# Altium PCB DONGLE02.PcbDoc
Units mil, origin at the board's own origin, x right, y up, seen from the top; angles counter-clockwise.
Board outline 1501.71 x 652.99 mil, 2 copper layers (Top Layer, Bottom Layer), stack 41.756 mil thick; 14 components, 18 nets, 47 pads, 9 vias.
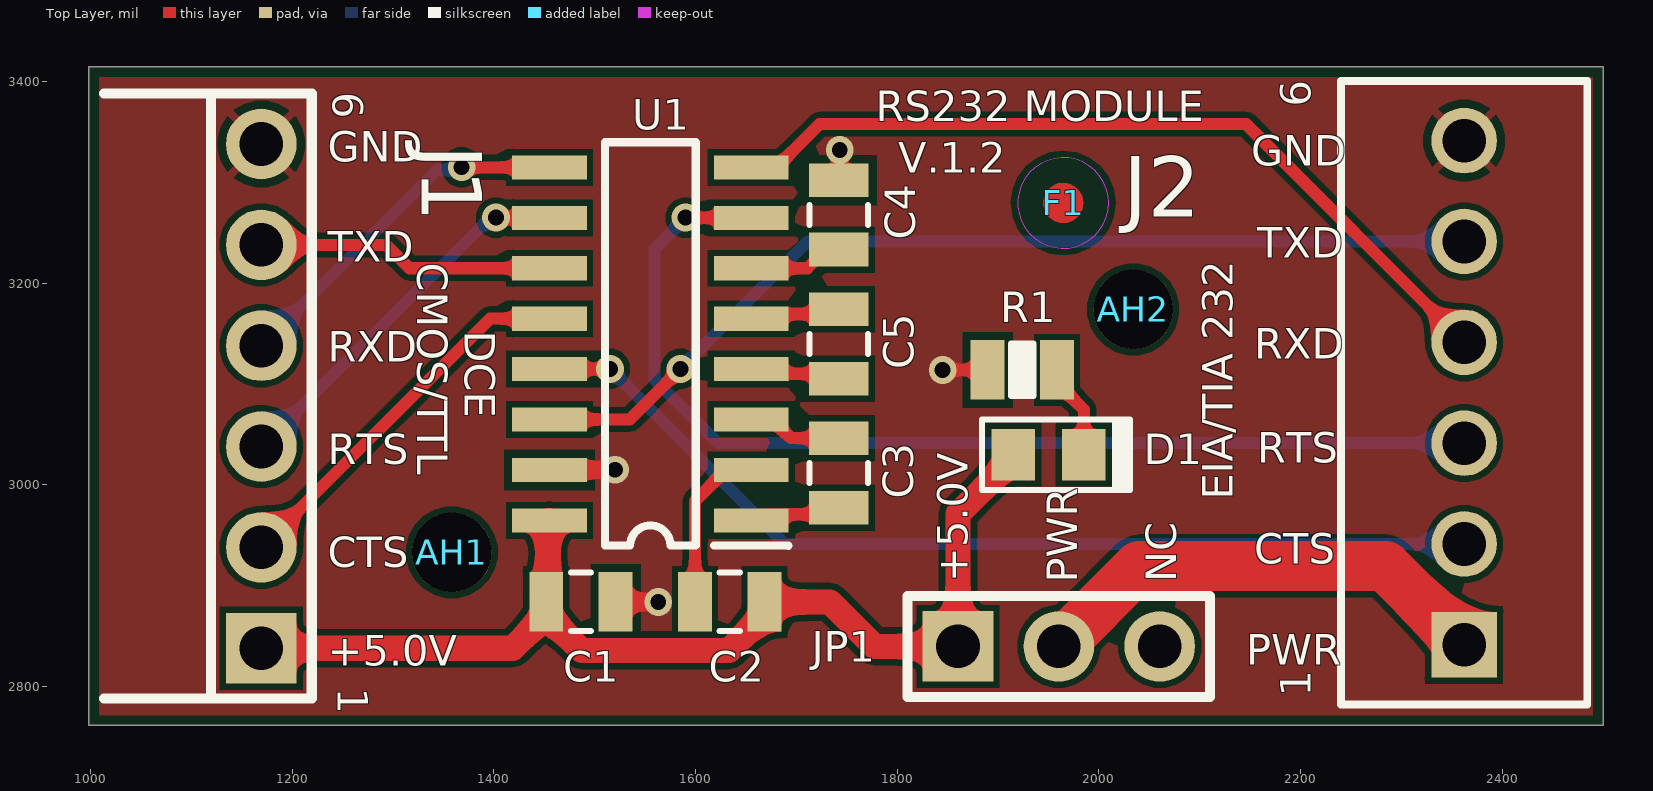
[diagram p0: Top Layer view]
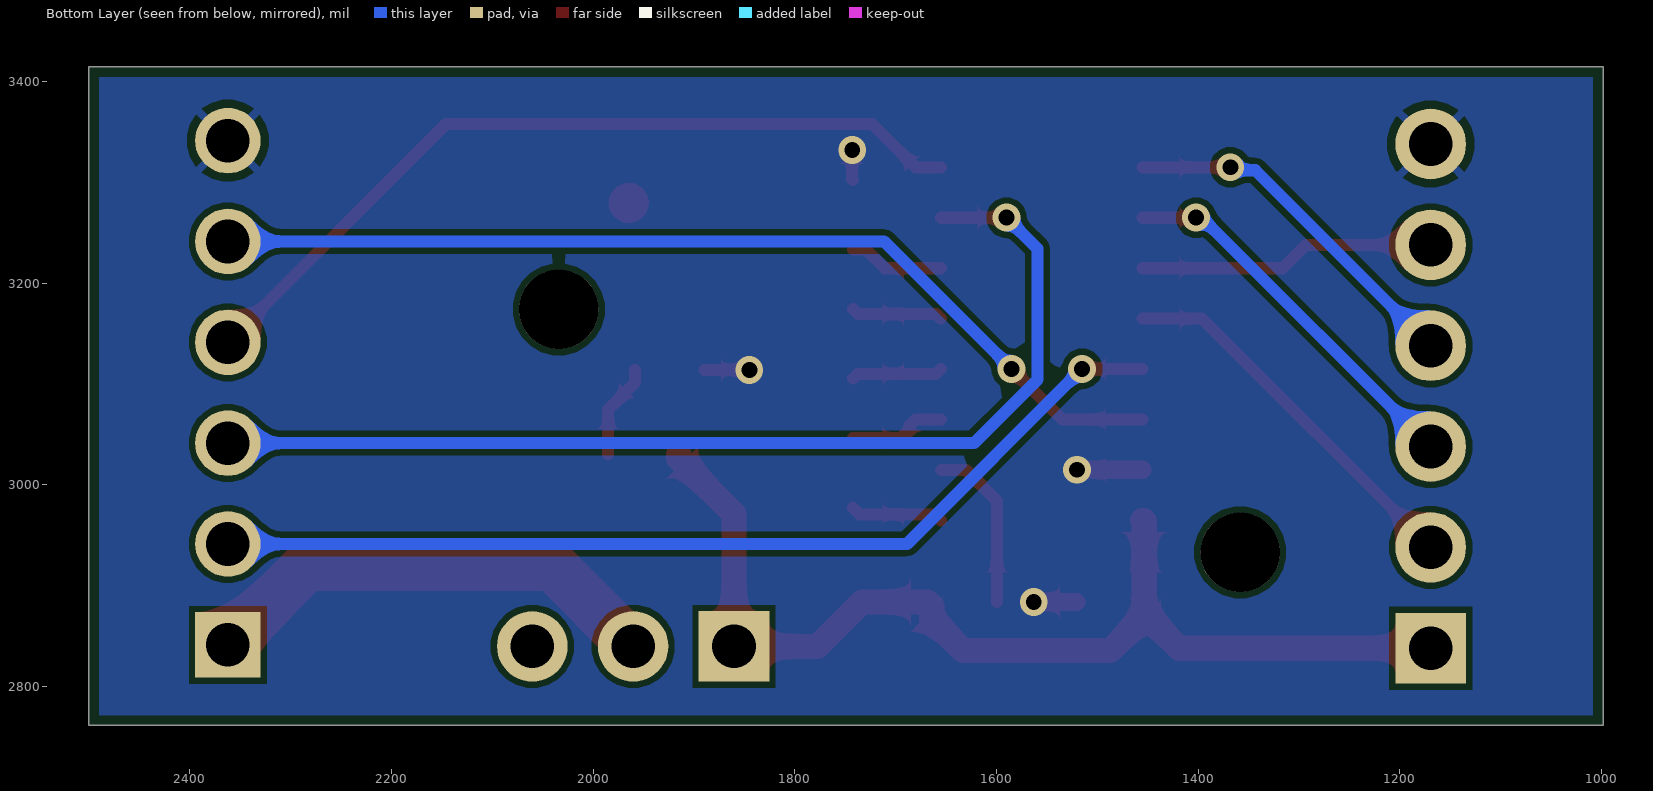
[diagram p1: Bottom Layer view, seen from below]
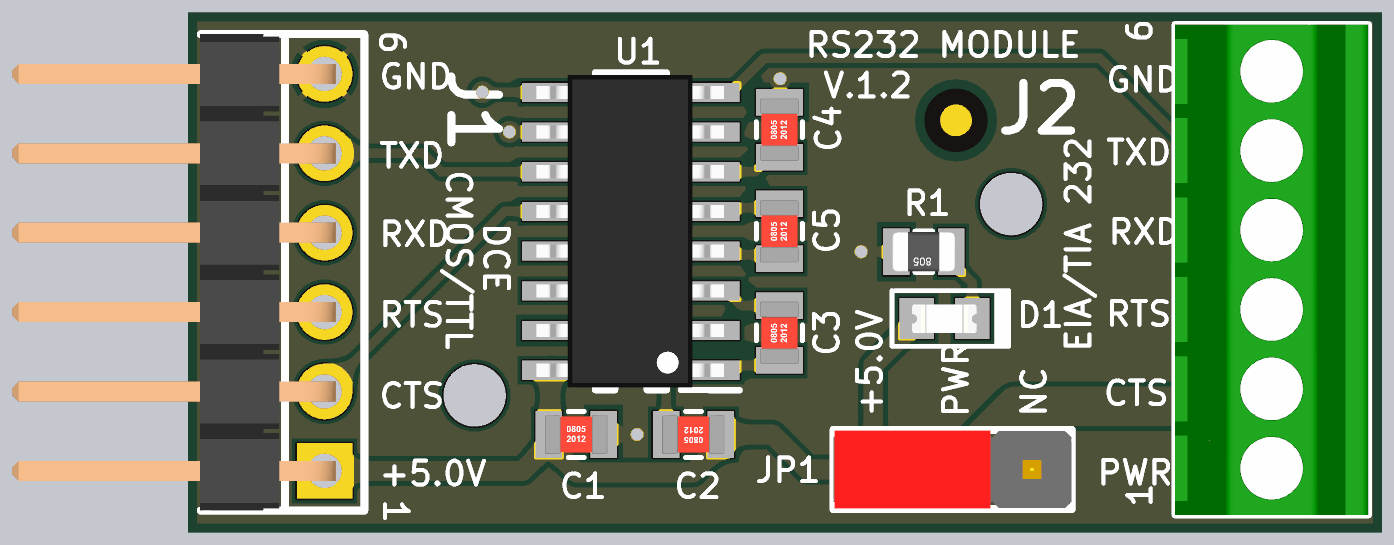
[diagram p2: 3D render of the assembled board from above, using the file's embedded part models]

## Layer stack, top to bottom
Top Solder: solder mask 1, SM-001, Dk 4
Top Layer: signal copper 1.378
Dielectric 1: core 39, Core-042, Dk 4.6
Bottom Layer: signal copper 1.378
Bottom Solder: solder mask 1, SM-001, Dk 4

## Board outline
998.29,2761.5 2500,2761.5 2500,3414.49 998.29,3414.49

## Design rules (kind name [scope] priority, off if disabled: settings)
BoardOutlineClearance [All] p1: gap=10 ignorepadtopadclearanceinfootprint=FALSE except(0: Arc-SplitContinuation Track-SplitContinuation SMDPad-SplitContinuation THPad-SplitContinuation Via-SplitContinuation Fill-SplitContinuation Poly-SplitContinuation Region-SplitContinuation Text-SplitContinuation)
Clearance [All] p1: gap=6 ignorepadtopadclearanceinfootprint=TRUE
PolygonConnect [All] p1: thpad.connectstyle=Relief thpad.reliefconductorwidth=8 thpad.reliefentries=4 thpad.polygonreliefangle="90 Angle" thpad.airgapwidth=8 thpad.conductorbypadedge=TRUE thpad.mindistance=15 thpad.enablemindistance=FALSE smdpad.connectstyle=NoConnect smdpad.reliefconductorwidth=8 smdpad.reliefentries=4 smdpad.polygonreliefangle="90 Angle" smdpad.airgapwidth=8 via.connectstyle=Direct via.reliefconductorwidth=8 via.reliefentries=4 via.polygonreliefangle="90 Angle" via.airgapwidth=8
RoutingVias [All] p1: holewidth=28 width=50 viastyle="Through Hole" minholewidth=28 minwidth=50 maxholewidth=28 maxwidth=50 useviatemplates=TRUE viatemplateguid#1={9099A8C9-6F9B-4F98-8F80-C86D27A5C1E5} viatemplatename#1=v70h40
SilkToSilkClearance [All] p1: silktosilkclearance=5
SilkToSolderMaskClearance [IsPad] p1: minsilkscreentomaskgap=3.54 clearancetoexposedcopper=TRUE
SolderMaskExpansion Via [IsVia] p1: expansion=4 istentingtop=TRUE
SolderMaskExpansion Generic [All] p2: expansion=2 istentingtop=FALSE
SupplyNets "Schematic Supply Nets_3" [InNet('+5.0V')] p1: voltage=0.000
SupplyNets "Schematic Supply Nets_2" [InNet('GND')] p2: voltage=0.000
UnRoutedNet [All] p1: checkbadconnections=TRUE
Width [All] p1: maxlimit=50 minlimit=10 preferedwidth=12
27 further rules are at their usual default settings.

## Components (designator, comment, footprint, x,y, rotation, side; value= is the part's Value field where it differs from the comment)
AH1 "Furo de Alinhamento" AH_2.0MMD 1358.27,2933.07 r0 top
AH2 "Furo de Alinhamento" AH_2.0MMD 2034,3174 r0 top
C1 "0.1uF" C0805 1486.22,2883.86 r90 top
C2 "0.33uF" C0805 1633.86,2883.86 r270 top
C3 "0.047uF" C0805 1742.13,3011.81 r180 top
C4 "0.33uF" C0805 1742.13,3267.72 r180 top
C5 "0.33uF" C0805 1742.13,3139.76 r180 top
D1 "Blue Led 0805" "LED 0805" 1950,3030 r180 top
F1 "" FIDUCIAL 1964.57,3279.53 r0 top
J1 "Header 6" BERG-M-6V-H-INV 1169.29,3337.99 r270 top value="1x6 0.1\" Right Angle Pin Header"
J2 "MPT 0,5/ 6-2,54" 1725698 2362.2,2841.34 r90 top
JP1 "Header 3 Pin" JMP-3-PTH-180 1960.24,2839.76 r0 top
R1 "180R" R0805 1924,3114 r270 top
U1 "2/2 RS232 400kbps" SOIC16N 1555.12,3139.76 r180 top

## Footprints (in the part's own frame and the unit in brackets; to place one, negate y for a bottom-side part, rotate by r counter-clockwise, add the part's x,y. Pads: shape width x height; smd on the part's side, far side on the other; paste and mask are expansions set on the pad)
1725698 [mm]
  rect 1.65x1.65 hole 1.1: 1(0,0)
  round 1.65 hole 1.1: 2(2.54,0) 3(5.08,0) 4(7.62,0) 5(10.16,0) 6(12.7,0)
  silkscreen extent -1.5,-3.1 14.2,3.1, body extent -1.5,-3.1 14.2,3.1, height 8.61
AH_2.0MMD [mm] "Alignment Hole M2"
  round 2 hole 2 unplated: 1(0,0)
BERG-M-6V-H-INV [mil] "Conector Barra Pinos 6 vias 90º passo 0.1\""
  rect 70x70 hole 43.31: 1(500,0)
  round 70 hole 43.31: 2(400,0) 3(300,0) 4(200,0) 5(100,0) 6(0,0)
  silkscreen extent -50,-156 550,50, body extent -50,-393 550,15, height 103
C0805 [mm]
  rect 1.5x0.85 smd mask+0.05: 1(0,0.875) 2(0,-0.875)
  silkscreen extent -0.74,-0.25 0.74,0.25, body extent -0.62,-1 0.63,1, height 0.9
FIDUCIAL [mil] "Alvo Optico"
  Top Layer circle w20: c0,0 r10
  Top Layer pour cut-out: -45,0 -44.62,-5.87 -43.47,-11.65 -41.57,-17.22 -38.97,-22.5 -35.7,-27.39 -31.82,-31.82 -27.39,-35.7 -22.5,-38.97 -17.22,-41.57 -11.65,-43.47 -5.87,-44.61 0,-45 5.87,-44.61 11.65,-43.47 17.22,-41.57 22.5,-38.97 27.39,-35.7 31.82,-31.82 35.7,-27.39 38.97,-22.5 41.57,-17.22 43.47,-11.65 44.62,-5.87 45,0 44.62,5.87 43.47,11.65 41.57,17.22 38.97,22.5 35.7,27.39 31.82,31.82 27.39,35.7 22.5,38.97 17.22,41.57 11.65,43.47 5.87,44.62 0,45 -5.87,44.62 -11.65,43.47 -17.22,41.57 -22.5,38.97 -27.39,35.7 -31.82,31.82 -35.7,27.39 -38.97,22.5 -41.57,17.22 -43.47,11.65 -44.62,5.87
  Top Layer keep-out circle w1: c0,0 r45
JMP-3-PTH-180 [mil] "Jumper 3 pinos PTH 180º passo 2.54mm"
  rect 70x70 hole 43.31: 1(-100,0)
  round 70 hole 43.31: 2(0,0) 3(100,0)
  silkscreen extent -150,-50 150,50, body extent -150,-49 150,49, height 323
"LED 0805" [mm]
  rect 1.1x1.3 smd mask+0.051: A(0.889,0) K(-0.889,0)
  silkscreen extent -2.06,-0.89 1.68,0.89, body extent -1.03,-0.44 1.03,0.47, height 0.85
R0805 [mm]
  rect 1.5x0.85 smd mask+0.05: 1(0,0.875) 2(0,-0.875)
  silkscreen extent -0.66,-0.28 0.66,0.28, body extent -0.62,-1 0.63,1, height 0.78
SOIC16N [mil] "16 Pin SOIC Narrow (9,90x3,90)"
  rect 74x24 smd: 1(-100,175) 2(-100,125) 3(-100,75) 4(-100,25) 5(-100,-25) 6(-100,-75) 7(-100,-125) 8(-100,-175) 9(100,-175) 10(100,-125) 11(100,-75) 12(100,-25) 13(100,25) 14(100,75) 15(100,125) 16(100,175)
  silkscreen extent -137,-200 45,200, body extent -117,-197 119,197, height 69

## Part data
AH1 AH2: library part "Aligment Hole M2", RefDes=RefDes, Supplier=Digikey
C1: library part CAP, "0.1 µF ±10% 100V Ceramic Capacitor X7R 0805 (2012 Metric)", Manufacturer="Murata Electronics", Manufacturer P/N=GCM21BR72A104KA37L, Datasheet Web=https://search.murata.co.jp/Ceramy/image/img/A01X/G101/ENG/GCM033R71A103KA03-01A.pdf, Info=MLCC, RefDes=RefDes, Supplier=Digikey, Supplier P/N (Cut Tape)=490-4789-1-ND, Supplier P/N (Tape & Reel)=490-4789-2-ND, Supplier Web=https://www.digikey.com/en/products/detail/murata-electronics/GCM21BR72A104KA37L/1641663?s=N4IgTCBcDaIOIGECyYCMAhASgdjAQVQAYAWAaTwGZsAZEAXQF8g
C2 C4 C5: library part CAP, "0.33 µF ±5% 25V Ceramic Capacitor X7R 0805 (2012 Metric)", Manufacturer=KEMET, Manufacturer P/N=C0805C334J3RECAUTO7210, Datasheet Web=https://content.kemet.com/datasheets/KEM_C1090_X7R_ESD.pdf, Info=MLCC, RefDes=RefDes, Supplier=Digikey, Supplier P/N (Cut Tape)=399-C0805C334J3RECAUTO7210CT-ND, Supplier P/N (Tape & Reel)=399-C0805C334J3RECAUTO7210TR-ND, Supplier Web=https://www.digikey.com/en/products/detail/kemet/C0805C334J3RECAUTO7210/8647991
C3: library part CAP, "0.047 µF ±5% 25V Ceramic Capacitor X7R 0805 (2012 Metric)", Manufacturer="KYOCERA AVX", Manufacturer P/N=KGM21NR71E473JT, Datasheet Web=https://datasheets.kyocera-avx.com/KGM_X7R.pdf, Info=MLCC, RefDes=RefDes, Supplier=Digikey, Supplier P/N (Cut Tape)=478-KGM21NR71E473JTCT-ND, Supplier P/N (Tape & Reel)=478-KGM21NR71E473JTTR-ND, Supplier Web=https://www.digikey.com/en/products/detail/kyocera-avx/KGM21NR71E473JT/1602247
D1: library part "LED GREEN 0805", "Blue 470nm LED Indication - Discrete 3.2V 0805 (2012 Metric)", Manufacturer="Würth Elektronik", Manufacturer P/N=150080BS75000, Datasheet Web=https://www.we-online.com/components/products/datasheet/150080BS75000.pdf, Info="Id = 0.5 Inom (10mA)", RefDes=RefDes, Supplier=Digikey, Supplier P/N (Cut Tape)=732-4982-1-ND, Supplier P/N (Tape & Reel)=732-4982-2-ND, Supplier Web=https://www.digikey.com/en/products/detail/w%C3%BCrth-elektronik/150080BS75000/4489912
F1: library part FIDUCIAL, "FIDUCIAL MARK", RefDes=rRefDes, Supplier=Digikey
J1: "Connector Header Through Hole, Right Angle 6 position 0.100\" (2.54mm)", Manufacturer="Adam Tech", Manufacturer P/N=PH1RB-06-UA, Datasheet Web=https://app.adam-tech.com/products/download/data_sheet/201281/ph1rb-xx-ua-data-sheet.pdf, Info="CONN HEADER R/A 6POS 2.54MM", RefDes=RefDes, Supplier=Digikey, Supplier P/N (Cut Tape)=2057-PH1RB-06-UA-ND, Supplier P/N (Tape & Reel)=2057-PH1RB-06-UA-ND, Supplier Web=https://www.digikey.com/en/products/detail/adam-tech/PH1RB-06-UA/9830592
J2: library part 691322110006, "6 Position Wire to Board Terminal Block Horizontal with Board 0.100\" (2.54mm) Through Hole", Manufacturer="Phoenix Contact", Manufacturer P/N=1725698, Datasheet Web=https://www.phoenixcontact.com/en-us/products/printed-circuit-board-terminal-mpt-05-6-254-1725698?type=pdf, Info="Borne 6pos 6A e=2,54", RefDes=RefDes, Supplier=Digikey, Supplier P/N (Cut Tape)=277-1277-ND, Supplier P/N (Tape & Reel)=277-1277-ND, Supplier Web=https://www.digikey.com/en/products/detail/phoenix-contact/1725698/267466
JP1: library part "Jumper 3", "3 Pin Jumper", Manufacturer="Würth Elektronik", Manufacturer P/N=61300311121, Datasheet Web=https://www.we-online.com/components/products/datasheet/61300311121.pdf, Info="0.1\" Pin header 1x3", RefDes=RefDes, Supplier=Digikey, Supplier P/N (Cut Tape)=732-5316-ND, Supplier P/N (Tape & Reel)=732-5316-ND, Supplier Web=https://www.digikey.com/en/products/detail/w%C3%BCrth-elektronik/61300311121/4846825
R1: library part RESISTOR, "180 Ohms ±1% 0.25W, 1/4W Chip Resistor 0805 (2012 Metric) Anti-Sulfur Thin Film", Manufacturer="Stackpole Electronics Inc", Manufacturer P/N=RNCP0805FTD180R, Datasheet Web=https://www.seielect.com/catalog/sei-rncp.pdf, Info="1% 100 PPM", RefDes=RefDes, Supplier=Digikey, Supplier P/N (Cut Tape)=RNCP0805FTD180RCT-ND, Supplier P/N (Tape & Reel)=RNCP0805FTD180RTR-ND, Supplier Web=https://www.digikey.com/en/products/detail/stackpole-electronics-inc/RNCP0805FTD180R/2240212
U1: library part "CI SMD ST3232CDR-SO16", "2/2 Transceiver Full RS232 16-SO", Manufacturer=STMicroelectronics, Manufacturer P/N=ST3232CDR, Datasheet Web=https://www.st.com/content/ccc/resource/technical/document/datasheet/group1/40/2c/7f/62/3a/3f/47/3c/CD00002253/files/CD00002253.pdf/jcr:content/translations/en.CD00002253.pdf, Info=ST3232CDR, RefDes=RefDes, Supplier=Digikey, Supplier P/N (Cut Tape)=497-3731-1-ND, Supplier P/N (Tape & Reel)=497-3731-2-ND, Supplier Web=https://www.digikey.com/en/products/detail/stmicroelectronics/ST3232CDR/686410?s=N4IgTCBcDaIMoBUDMYUGEAiAlEBdAvkA

## Via types
v1: diameter 27.56, hole 15.75, Top Layer to Bottom Layer, tented both sides, 9 vias

## Nets (pads, with @x,y where several pads share a name; then routed paths per layer and width w, separated by ;. In a path a pad name is that pad's centre, name@x,y a point inside that pad or via, vN(x,y) a via of type N, cw(c..) or ccw(c..) an arc to the next point about the centre after c; other vN are vias at no path point)
+5.0V: C1.1 C2.1 D1.A J1.1 JP1.1 U1.16 | length 1062.5
  Top Layer w25: J1.1 1418.7,2837.99 1451.77,2871.06 1487,2835.83 1633.07,2835.83 1664.07,2866.83 1664.07,2879.63 C2.1 ; C1.1 1453.44,2885.53 1453.44,2964.26 1453.94,2964.76 U1.16 ; C2.1@1668.31,2879.63 1672.54,2883.86 1733.09,2883.86 1777.19,2839.76 JP1.1 1860.24,2971.3 1915,3026.06 D1.A
DCE.CTS: J1.2 U1.12 | length 379.8
  Top Layer w12: J1.2 1396.06,3164.76 U1.12
DCE.RTS: J1.3 U1.10 | length 380
  Top Layer w12: v1(1402,3265) 1402.12,3264.88 1455,3264.88 U1.10
  Bottom Layer w12: J1.3 1393.32,3262.02 1399.02,3262.02 v1(1402,3265)
DCE.RXD: J1.4 U1.9 | length 359.2
  Top Layer w12: v1(1368,3315) 1368.12,3314.88 1455,3314.88 U1.9
  Bottom Layer w12: J1.4 1343.32,3312.02 1365.02,3312.02 v1(1368,3315)
DCE.TXD: J1.5 U1.11 | length 295.4
  Top Layer w12: J1.5 1292.94,3237.99 1316.17,3214.76 U1.11
GND: C1.2 C4.2 J1.6 J2.6 R1.2 U1.15 | length 182
  Top Layer w12: C4.2 1743,3303.04 v1(1743,3332) ; v1(1845,3114) R1.2
  Top Layer w18: U1.15 1455.24,3014.88 1519.88,3014.88 v1(1520,3015) ; C1.2 v1(1562.9,2883.86)
NetC2_2: C2.2 U1.2 | length 168.6
  Top Layer w12: C2.2 1599.41,2984.05 1630.12,3014.76 U1.2
NetC3_1: C3.1 U1.1 | length 92.2
  Top Layer w12: U1.1 1661.12,2970.76 1735.53,2970.76 C3.1
NetC3_2: C3.2 U1.3 | length 97
  Top Layer w12: U1.3 1680.12,3064.76 1686.12,3058.76 1686.12,3054.74 1694.6,3046.26 C3.2
NetC4_1: C4.1 U1.6 | length 94.7
  Top Layer w12: U1.6 1710.83,3214.76 1729.33,3233.27 C4.1
NetC5_1: C5.1 U1.4 | length 90.9
  Top Layer w12: U1.4 1659.84,3110.04 1737.4,3110.04 C5.1
NetC5_2: C5.2 U1.5 | length 90.9
  Top Layer w12: U1.5 1659.84,3169.49 1737.4,3169.49 C5.2
NetD1_K: D1.K R1.1 | length 95
  Top Layer w12: R1.1 1958.45,3101.2 1985,3074.65 D1.K
NetJ2_1: J2.1 JP1.2 | length 467.4
  Top Layer w50: JP1.2 2040,2919.53 2284.01,2919.53 J2.1
RS232.CTS: J2.2 U1.13 | length 979.1
  Top Layer w12: U1.13 1455.24,3114.88 1514.88,3114.88 v1(1515,3115)
  Bottom Layer w12: v1(1515,3115) 1688.66,2941.34 J2.2
RS232.RTS: J2.3 U1.7 | length 1067.7
  Top Layer w12: v1(1590,3265) 1590.12,3264.88 1655,3264.88 U1.7
  Bottom Layer w12: v1(1590,3265) 1559.22,3234.22 1559.22,3104.32 1622.2,3041.34 J2.3
RS232.RXD: J2.4 U1.8 | length 814.6
  Top Layer w12: U1.8 1680.12,3314.76 1723.13,3357.78 2145.76,3357.78 J2.4
RS232.TXD: J2.5 U1.14 | length 980.2
  Top Layer w12: U1.14 1534.76,3064.76 v1(1585,3115)
  Bottom Layer w12: v1(1585,3115) 1711.34,3241.34 J2.5
pads on no net: AH1.1 AH2.1 JP1.3

## Polygon pours and split planes (outlines as drawn)
GND on Top Layer "GND_L01_P000" (solid, remove dead copper, pour order 0): 998.29,2761.5 2500,2761.5 2500,3414.49 998.29,3414.49
GND on Bottom Layer "GND_L02_P001" (solid, remove dead copper, pour order 1): 998.29,2761.5 2500,2761.5 2500,3414.49 998.29,3414.49

## Silkscreen, mask and mechanical layers (free items; w line width, h text height)
Top Overlay:
  text "6" at 2210,3375 h30 r90
  text "RS232 MODULE" at 1778.63,3360.44 h30
  text "GND" at 1235.32,3320.55 h30
  text "GND" at 2150.8,3316.65 h30
  text "V.1.2" at 1800.82,3309.33 h30
  text "TXD" at 2157.08,3225 h30
  text "TXD" at 1235.32,3221 h30
  text "CMOS/TTL" at 1324,3220 h30 r270
  text "DCE" at 1371,3153 h30 r270
  text "RXD" at 2153.94,3125 h30
  text "RXD" at 1235.32,3122 h30
  text "RTS" at 2157.08,3021.65 h30
  text "RTS" at 1235.32,3020.55 h30
  text "EIA/TIA 232" at 2132.9,2985.25 h30 r90
  text "CTS" at 2153.94,2921.65 h30
  text "CTS" at 1235.32,2918.39 h30
  text "PWR" at 2146.09,2821.65 h30
  text "+5.0V" at 1235.32,2820.55 h30
  text "1" at 2210,2790 h30 r90
Board:
  the board outline again, w2
  text "Open Hardware. Free to Copy." at 862.11,3586.36 h150

## Dimensions
2500,2761.5 to 998.29,2761.5 on Board
2500,2761.5 to 2500,3414.49 on Board

## Text inside footprints (layer, text, board x,y; h text height)
J1: Top Overlay "6" at 1240,3389.28 h30 r270; Top Overlay "1" at 1245,2798.57 h30 r270
JP1: Top Overlay "+5.0V" at 1870.08,2903.54 h30 r90; Top Overlay "NC" at 2076.77,2903.54 h30 r90; Top Overlay "PWR" at 1978.44,2903.09 h30 r90